# Altium PCB MZCAT_motherboard.PcbDoc (part 2 of 4)
Units mm, origin at the board's own origin, x right, y up, seen from the top; angles counter-clockwise.
Board outline 99.01 x 133.6 mm, 6 copper layers (Top Layer, Ref Top, Layer 2, Layer 3, Ref Bot, Bottom Layer), stack 1.473 mm thick; 289 components, 231 nets, 1176 pads, 492 vias.
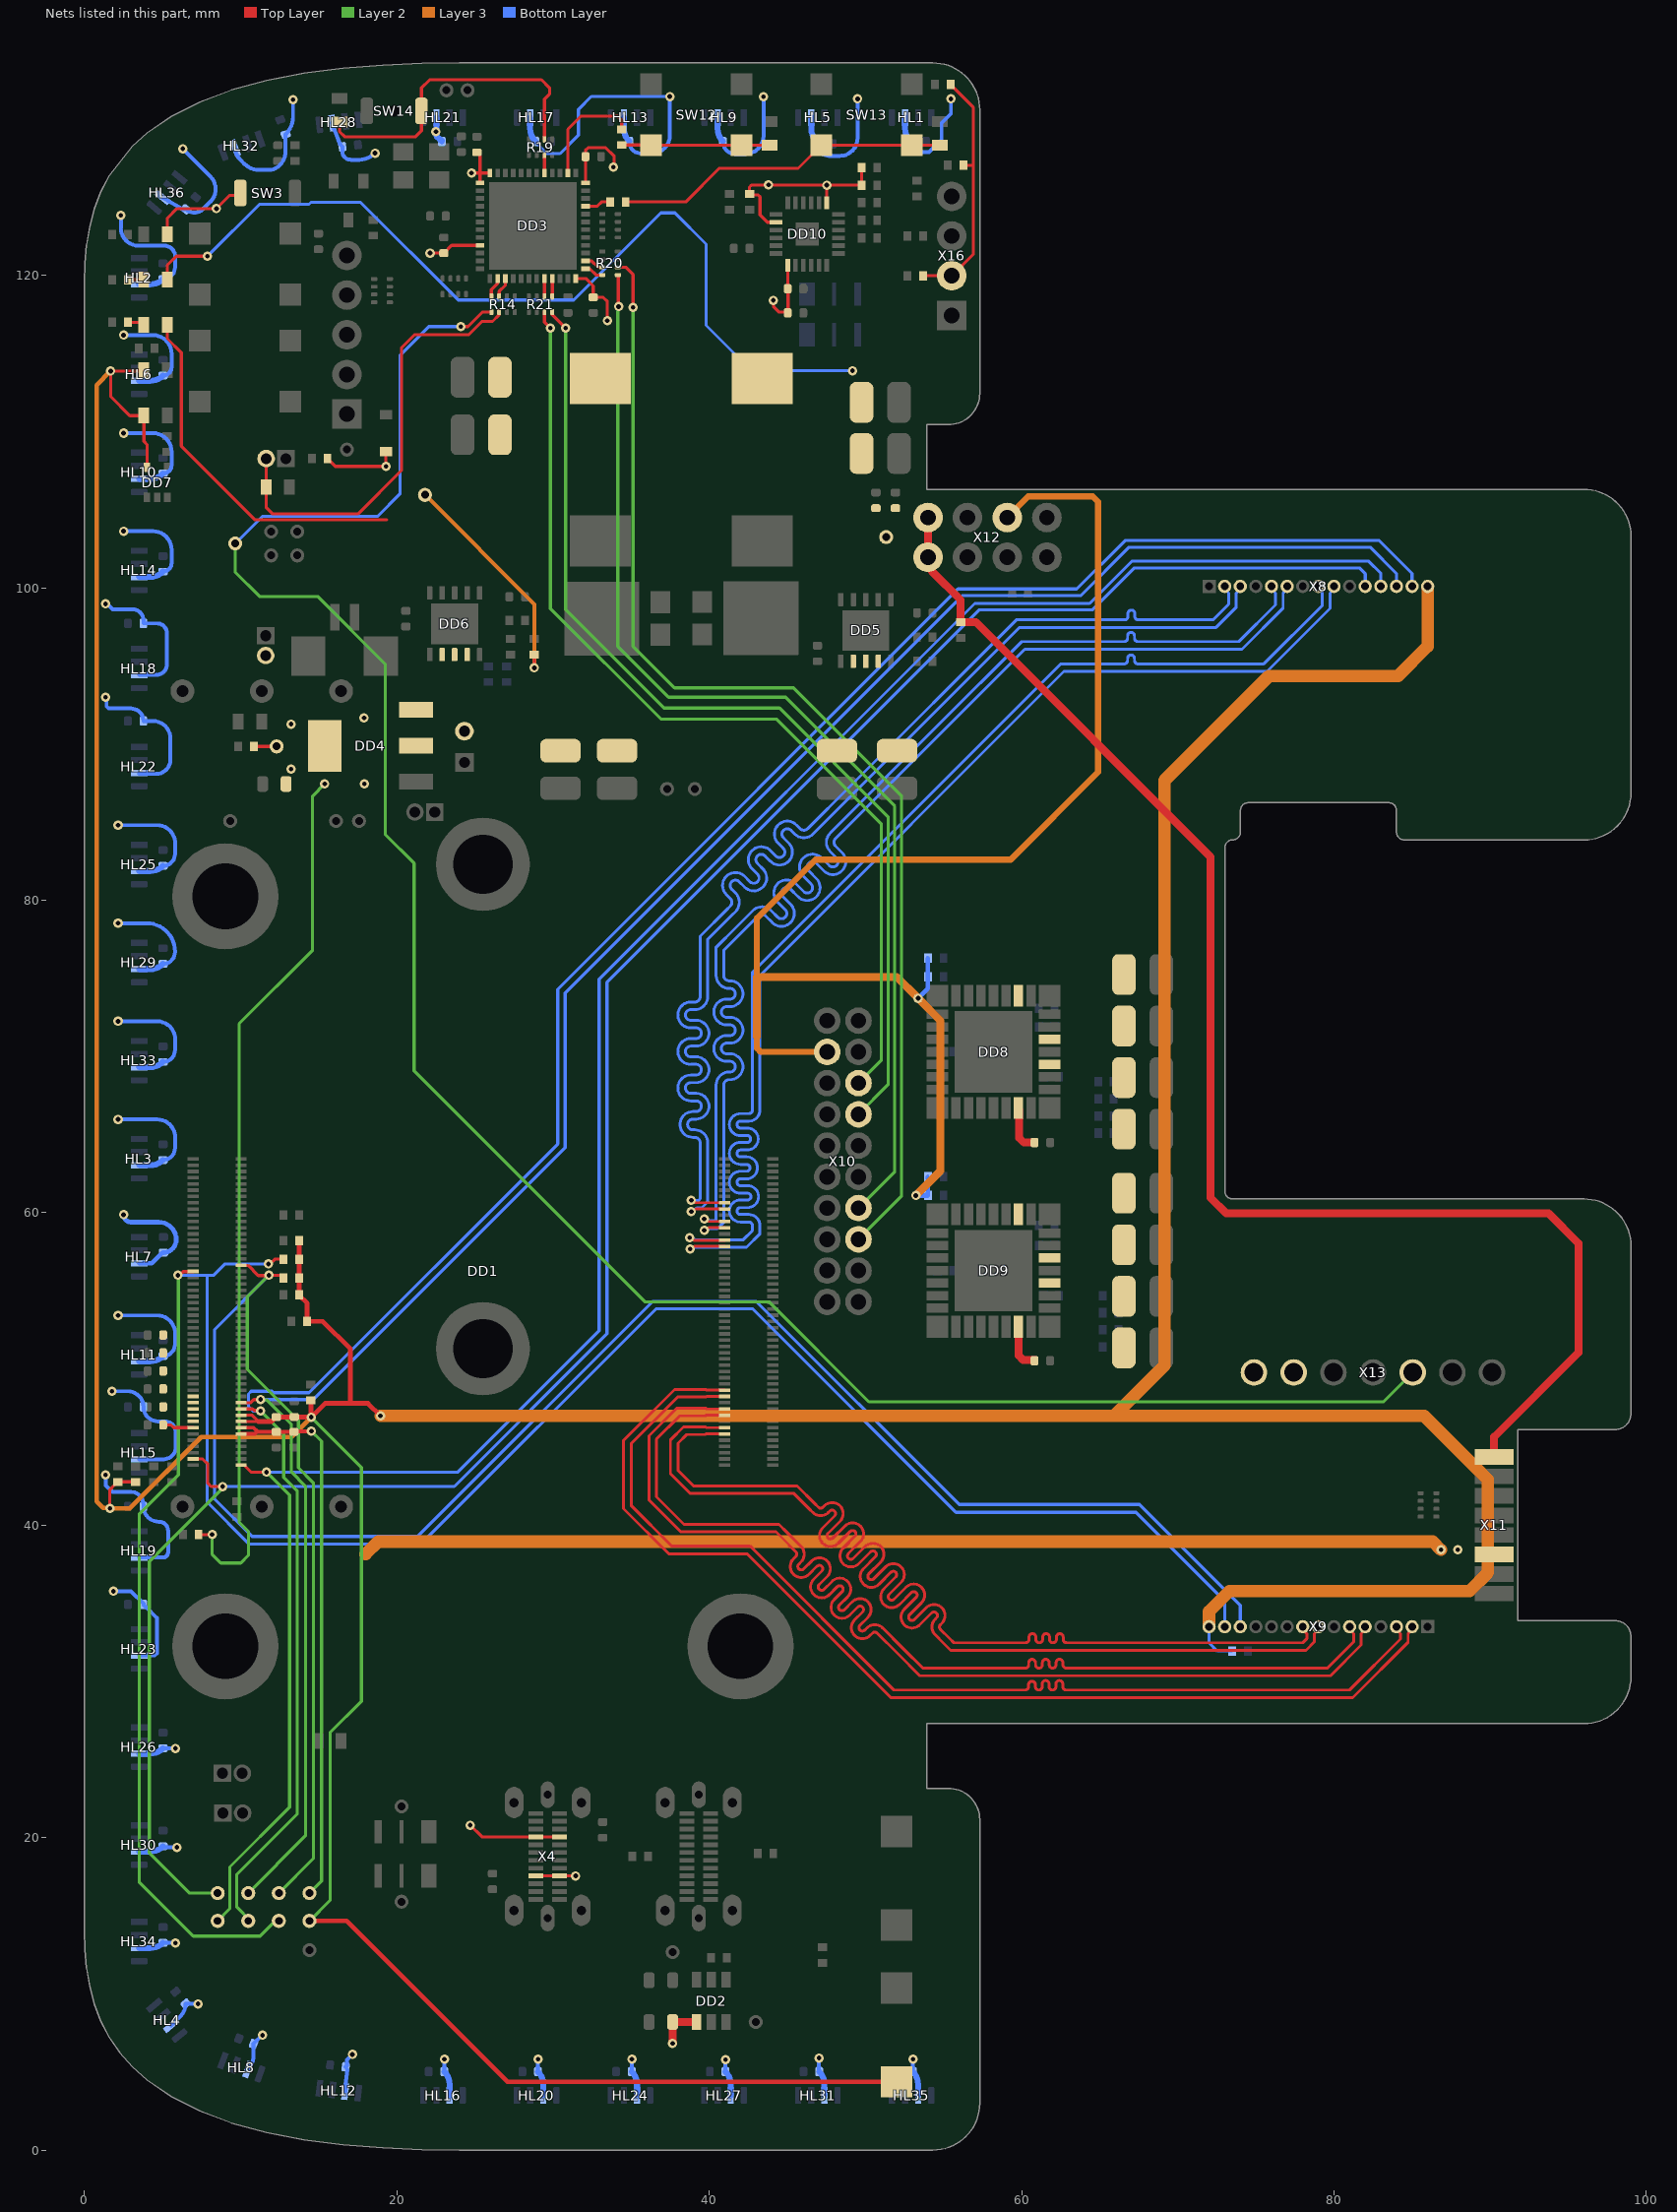
[diagram p6: the nets of this part, all layers, seen from the top]

## Footprints (in the part's own frame and the unit in brackets; to place one, negate y for a bottom-side part, rotate by r counter-clockwise, add the part's x,y. Pads: shape width x height; smd on the part's side, far side on the other; paste and mask are expansions set on the pad) (continued)
SOT23-6 [mm] "SOT95P280X145-6N, SOT23, 6-Leads, Body 2,90x2,80mm, Pitch 0,95mm, IPC Medium Density"
  rect 1x0.6 smd: 1(-1.35,0.95) 2(-1.35,0) 3(-1.35,-0.95) 4(1.35,-0.95) 5(1.35,0) 6(1.35,0.95)
  silkscreen extent -1.47,-1.55 0.45,1.92, body extent -0.85,-1.55 0.85,1.55, height 1.45
SOT353 [mm]
  rect 0.6x0.42 smd: 1(-0.95,0.65) 2(-0.95,0) 3(-0.95,-0.65) 4(0.95,-0.65) 5(0.95,0.65)
  silkscreen extent -1.25,-1.2 0.75,1.4, body extent -1.17,-1.13 1.12,1.12, height 1.1
SOT-223 [mm] "MC33269"
  rect 2.15x1 smd: 1(-2.925,2.3) 2(-2.925,0) 3(-2.925,-2.3)
  rect 2.15x3.3 smd: 2(2.925,0)
  silkscreen extent -1.55,-3.35 1.55,3.35, body extent -3.48,-3.25 3.48,3.25, height 1.65
SRP1038A [mm] "SRP1038A-4R7M"
  rect 3.3x3.9 smd: 1(-5.2,0) 2(5.2,0)
  silkscreen extent -5.25,-4.85 5.25,4.85, body extent -5.5,-5.15 5.5,5.15, height 4
TO-277A [mm] "SMPC (TO-277A)"
  rrect1% 1.27x1.4 smd: 1(-2.76,1.04) 2(-2.76,-1.04)
  rrect1% 4.8x4.72 smd: 3(1,0)
  silkscreen extent -3.25,-2.3 3.73,2.7, body extent -3.25,-2.3 3.25,2.3, height 1.2
UFQFPN48 [mm] "PQFN, 48-Leads, Body 7,00x7,00mm, Pitch 0,50mm, Thermal Pad 5,60x5,60mm, IPC Medium Density"
  rrect50% 0.55x0.3 smd: 1(-3.375,2.75)
  rect 0.55x0.3 smd: 2(-3.375,2.25) 3(-3.375,1.75) 4(-3.375,1.25) 5(-3.375,0.75) 6(-3.375,0.25) 7(-3.375,-0.25) 8(-3.375,-0.75) 9(-3.375,-1.25) 10(-3.375,-1.75) 11(-3.375,-2.25) 12(-3.375,-2.75) 25(3.375,-2.75) 26(3.375,-2.25) 27(3.375,-1.75) 28(3.375,-1.25) 29(3.375,-0.75) 30(3.375,-0.25) 31(3.375,0.25) 32(3.375,0.75) 33(3.375,1.25) 34(3.375,1.75) 35(3.375,2.25) 36(3.375,2.75)
  rect 0.3x0.55 smd: 13(-2.75,-3.375) 14(-2.25,-3.375) 15(-1.75,-3.375) 16(-1.25,-3.375) 17(-0.75,-3.375) 18(-0.25,-3.375) 19(0.25,-3.375) 20(0.75,-3.375) 21(1.25,-3.375) 22(1.75,-3.375) 23(2.25,-3.375) 24(2.75,-3.375) 37(2.75,3.375) 38(2.25,3.375) 39(1.75,3.375) 40(1.25,3.375) 41(0.75,3.375) 42(0.25,3.375) 43(-0.25,3.375) 44(-0.75,3.375) 45(-1.25,3.375) 46(-1.75,3.375) 47(-2.25,3.375) 48(-2.75,3.375)
  rect 5.6x5.6 smd: 49(0,0)
  silkscreen extent -4.32,-3.55 3.55,3.55, body extent -3.55,-3.55 3.55,3.55, height 0.6
"ws2812b 4020" [mm] "ws2812b led in 4020 case"
  rrect50% 1.09x0.4 smd: 1(0,1.26)
  rect 1.09x0.4 smd: 2(0,0.42) 3(0,-0.42) 4(0,-1.26)
  silkscreen extent -1.5,-2.2 0.45,2.2, body extent -1.3,-2 0.45,2, height 2
WSON-10 [mm]
  rect 2.6x3 smd: 0(0,0)
  rect 0.85x0.35 smd paste-0.02 mask+0.08: 1(-1.975,1.6)
  rrect25% 0.85x0.35 smd paste-0.02 mask+0.08: 2(-1.975,0.8) 3(-1.975,0) 4(-1.975,-0.8) 5(-1.975,-1.6) 6(1.975,-1.6) 7(1.975,-0.8) 8(1.975,0) 9(1.975,0.8) 10(1.975,1.6)
  silkscreen extent -2.52,-2.15 1.3,2.32, body extent -2,-2 2,2, height 0.8

## Part data
DD1: "Raspberry Pi Compute Module 5", Name="Raspberry Pi CM5"
DD2: "PRECISION ADJUSTABLE CURRENT-LIMITED POWER SWITCHES", Name=AP22653W6
DD3: "микроконтроллер STM32F412, 48-UFQFPN, 100 MHz, 1024kB FLASH, 320kB RAM", Name=STM32F412CGU6
DD4: "LM1117GS-3.3", Contact_1=IN+, Contact_2=GND, Contact_3=OUT+, Name=LM1117-3.3
DD5 DD6: "Стабилизатор напряжения 5А", Name=LMR14050QDPRRQ1
DD7: "буферный элемент с открытым стоком", Name=74LVC1G07GW
DD8 DD9: "Драйвер мотора", Name=MС33926
HL1 HL2 HL3 HL4 HL5 HL6 HL7 HL8 HL9 HL10 HL11 HL12 HL13 HL14 HL15 HL16 HL17 HL18 HL19 HL20 HL21 HL22 HL23 HL24 HL25 HL26 HL27 HL28 HL29 HL30 HL31 HL32 HL33 HL34 HL35 HL36: "адресный светодиод на микросхеме WS2812b", Name=WS2812B
L1 L2: library part Индуктивность
R1 R2 R3 R4 R5 R6 R7 R8 R9 R10 R11 R16 R17 R18 R22 R23 R24 R25 R26 R27 R28 R29 R30 R31 R32 R33 R34 R35 R36 R37 R38 R39 R40 R42 R43 R44 R45 R46 R47 R48 R49 R50 R51 R52 R53 R54 R55 R56 R57 R58 R59 R60 R61 R62 R63 R64 R65 R66 R67 R68 R69 R70 R71 R72 R73 R74 R75 R76 R77 R78: library part "Резистор 0.05Вт", "Резистор 0,05Вт"
R12 R13 R14 R15 R19 R20 R21 R41: library part "Резисторная сборка 0.05 x 4"
SW1 SW2 SW3 SW6 SW9 SW12 SW13 SW14: library part button
SW4 SW5 SW7 SW8 SW15: library part Jumper, "Перемычка"
SW10 SW11: library part "Концевой выключатель"
VD1: library part "Diode Shottky", "Диод Шоттки"
VD2 VD3 VD4 VD7 VD8 VD9 VD10 VD11 VD12 VD13 VD14: library part "SMD светодиод", "Светодтод SMD"
  VD2 VD3 VD4 VD8 VD9 VD10 VD11 VD12 VD13 VD14: Name="Красный светодиод"
  VD7: Name="Синий светодиод"
VD5 VD6: library part SS10PH10, "Диод Шоттки"
VT1: "мосфет n-канал IRLML2502TRPBF", Name=IRLML2502TRPBF
X1 X4: "USB Type-C 3.1", Contact_1=GND, Contact_2=TX1P, Contact_3=TX1N, Contact_4=VBUS, Contact_5=CC1, Contact_6=DP, Contact_7=DN, Contact_8=SBU1, Contact_9=VBUS, Contact_10=RX2N, Contact_11=RX2P, Contact_12=GND, Contact_13=GND, Contact_14=RX1P, Contact_15=RX1N, Contact_16=VBUS, Contact_17=SBU2, Contact_18=DN, Contact_19=DP, Contact_20=CC2, Contact_21=VBUS, Contact_22=TX2N, Contact_23=TX2P, Contact_24=GND, Name=2047110001
X2 X3 X14 X15: library part "Jumper x3", "Перемычка паяльная на плате", Id=28, Name=SW_Jumper_3_pins, Доп_Тип=Перемычки, Основной тип="Места под пайку", Тип корпуса=0805
X6 X7: library part Header_2, "Разъем - 2 конт. розетка", Contact_1=VCC, Contact_2=GND, Contact_3=TP, Name=MW-2M
X8 X9: library part Header_15, "Разъем - 15 конт. папа", Contact_1=GND, Contact_2=RX_D0N, Contact_3=RX_D0P, Contact_4=GND, Contact_5=RX_D1N, Contact_6=RX_D1P, Contact_7=GND, Contact_8=RX_CLKON, Contact_9=RX_CLKOP, Contact_10=GND, Contact_11=CAM_IO0, Contact_12=CAM_IO1, Contact_13=SCL, Contact_14=SDA, Contact_15=+3,3В, Name="PLS 1.0 1x15"
X10: library part "PLS 10 x 2", Contact_1=M1A, Contact_2=M1A, Contact_3=GND, Contact_4=+5В, Contact_5=ENC1A, Contact_6=SDA, Contact_7=ENC1B, Contact_8=SCL, Contact_9=M1B, Contact_10=M1B, Contact_11=M2A, Contact_12=M2A, Contact_13=ENC2A, Contact_14=REFL, Contact_15=ENC2B, Contact_16=CAM_DP, Contact_17=GND, Contact_18=CAM_DN, Contact_19=M2B, Contact_20=M2B, Name=PLD2-2x10
X11 X12: library part Header_8, "Разъем - 8 конт. мама"
  X11: Contact_1=GND, Contact_2=GND, Contact_3=+5В, Contact_4=DN, Contact_5=DP, Contact_6=LED_DATA, Contact_7=SERVO_DATA, Contact_8=+7,2В, Name=PicoBlade-8
  X12: Contact_1=+7,2В, Contact_2=+7,2В, Contact_3=SERVO_X, Contact_4=SERVO_Y, Contact_5=+5В, Contact_6=LiDAR_TX, Contact_7=GND, Contact_8=GND
X13: library part Header_7_fth, "Разъем - 7 конт. папа", Contact_1=PACK+, Contact_2=PACK+, Contact_3=BTN1, Contact_4=BTN2, Contact_5=CHG_OUT, Contact_6=GND, Contact_7=GND, Contact_8=TP, Name=640456-7
X16: library part "PLS 1 x 4", Contact_1=SDA, Contact_2=SCL, Contact_3=+3,3В, Contact_4=GND, Name=DS1021-1x4
XT1: library part 12.88605, "Резонатор / Geyer", Name=12.88605
С1 С2 С3 С4 С5 С6 С7 С8 С9 С10 С11 С12 С13 С14 С15 С17 С18 С19 С20 С21 С22 С23 С24 С25 С26 С27 С28 С29 С30 С31 С32 С33 С34 С35 С36 С37 С38 С39 С40 С41 С42 С43 С44 С45 С46 С47 С48 С49 С50 С51 С52 С53 С54 С55 С56 С57 С58 С59 С60 С61 С62 С63 С64 С65 С66 С67 С68 С69 С70 С71 С72 С73 С74 С75 С76 С77 С78 С79 С80 С81 С82 С83 С84 С85 С86 С87 С88: library part "Кер. конденсатор"
DD10: Name=MPU9250
X5: Contact_1=+3,3В, Contact_2=SWCLK, Contact_3=GND, Contact_4=SWDIO, Contact_5=NRST, Name="PLS 1 x 5"

## Free pads (board coordinates)
  round 6 hole 3.8: 4(25.509,82.302) 6(25.509,51.302)

## Via types
v1: diameter 0.6, hole 0.3, Top Layer to Bottom Layer, tented both sides, 477 vias
v2: diameter 0.6, hole 0.3, Top Layer to Bottom Layer, 15 vias

## Nets (pads, with @x,y where several pads share a name; then routed paths per layer and width w, separated by ;. In a path a pad name is that pad's centre, name@x,y a point inside that pad or via, vN(x,y) a via of type N, cw(c..) or ccw(c..) an arc to the next point about the centre after c; other vN are vias at no path point)
5V_PWR_LED_5: R26.1 VD4.1 | length 1.1
  Top Layer w0.2: R26.1@2.775,117 3.625,117 VD4.1@3.8,116.825
7,2V_PWR_LED_5: R25.1 VD3.1 | length 1
  Top Layer w0.2: R25.1@2.775,119.725 VD3.1@3.8,119.725
+3,3В: DD3.1 DD3.9 DD3.24 DD3.36 DD3.48 DD4.2 DD10.1 DD10.8 DD10.13 R64.2 R69.2 R70.2 R73.2 R74.2 R75.2 R76.2 R77.2 R78.2 SW3.1 TP17.1 VD1.2 VD2.1 X16.3 С10.2 С11.2 С12.2 С13.2 С19.2 С59.2 С60.2 | length 118.5
  Top Layer w0.2: VD2.1@5.3,122.625 5.3,123.65 5.925,124.275 v1(8.45,124.275) 9.301,125.126 9.826,125.126 SW3.1@9.975,125.275 ; R78.2@7.3,39.4 v1(8.175,39.4) ; R77.2@10.85,89.85 TP17.1@12.175,89.85 ; R76.2@15.555,108.275 16.055,107.775 v1(19.3,107.775) VD1.2@19.3,108.725 ; v1(22.125,121.425) С11.2@23.005,121.425 23.505,121.925 DD3.9@25.325,121.925 ; v1(24.775,126.55) 25.325,126.55 ; С10.2@25.125,127.875 25.325,127.675 25.325,126.55 ; DD3.1@25.325,125.925 25.325,126.55 ; DD3.48@25.95,126.55 25.325,126.55 ; DD3.24@31.45,119.8 32.1,119.8 32.575,119.325 С12.2@32.575,118.6 33.2,118.6 33.475,118.325 v1(33.475,117.1) ; DD3.36@32.075,125.925 С13.2@32.075,127.6 32.075,127.999 32.251,128.175 33.366,128.175 33.915,127.625 33.915,126.974 v1(33.866,126.925) ; v1(44.1,118.4) 44.124,118.376 44.124,117.976 44.442,117.658 45.044,117.658 45.044,119.126 С59.2@45.025,119.145 ; DD10.8@44.275,123.4 43.725,123.4 43.25,123.875 43.25,125.033 43.133,125.15 42.575,125.15 R64.2@42.575,125.2 42.575,125.658 42.692,125.775 v1(47.525,125.775) ; С59.2@45.025,119.345 DD10.13@45.025,120.65 ; DD10.1@47.525,124.65 v1(47.525,125.775) ; R70.2@49.75,126.9 R69.2@49.75,125.775 v1(47.525,125.775) ; R73.2@53.7,119.98 X16.3@55.525,119.98 ; R75.2@55.45,132.225 55.45,132.175 55.6,132.025 55.625,132.025 56.916,130.734 56.916,127.05 R74.2@56.275,127.05 ; X16.3@55.526,119.98 56.916,121.37 56.916,127.03
  Layer 2 w0.2: v1(8.175,39.4) 8.175,38.125 8.725,37.575 10,37.575 10.5,38.075 10.5,39.588 9.9,40.188 9.9,72.1 14.6,76.8 14.6,86.675 v1(15.375,87.45)
  other v1: 17.925,87.45 13.225,88.4 13.225,91.275 17.9,91.675 43.8,125.8
+3S: DD4.3 DD5.2 DD5.3 DD5.4 DD6.2 DD6.3 DD6.4 DD8.4 DD8.6 DD8.11 DD8.31 DD9.4 DD9.6 DD9.11 DD9.31 X7.1 X13.1 X13.2 С14.2 С15.2 С17.2 С18.2 С40.2 С41.2 С42.2 С43.2 С44.1 С45.1 С46.2 С47.2 С48.2 С49.2 | length 6.1
  Top Layer w0.2: DD8.31@59.75,66.648 DD8.31@59.8,66.698
  Top Layer w0.5: DD8.31@59.75,66.648 59.85,66.548 59.85,64.785 60.143,64.492 С44.1@60.827,64.492 ; DD9.31@59.8,52.698 59.8,50.871 60.093,50.578 С45.1@60.827,50.578
+5В: DD1.77 DD1.79 DD1.81 DD1.83 DD1.85 DD1.87 DD2.1 HL1.2 HL2.2 HL3.2 HL4.2 HL5.2 HL6.2 HL7.2 HL8.2 HL9.2 HL10.2 HL11.2 HL12.2 HL13.2 HL14.2 HL15.2 HL16.2 HL17.2 HL18.2 HL19.2 HL20.2 HL21.2 HL22.2 HL23.2 HL24.2 HL25.2 HL26.2 HL27.2 HL28.2 HL29.2 HL30.2 HL31.2 HL32.2 HL33.2 HL34.2 HL35.2 HL36.2 L2.1 R29.2 R50.1 R53.1 R54.1 R56.1 SW4.2 TP18.1 VD4.2 X4.4 X4.9 X4.16 X4.21 X10.4 X11.3 X12.5 С1.2 С25.2 С27.2 С30.2 С32.2 С34.2 С37.2 С38.2 С39.2 С51.2 С52.2 С53.2 С54.2 С55.2 С56.2 С57.2 С58.2 С61.2 С62.2 С63.2 С64.2 С65.2 С66.2 С67.2 С68.2 С69.2 С70.2 С71.2 С72.2 С73.2 С74.2 С75.2 С76.2 С77.2 С78.2 С79.2 С80.2 С81.2 С82.2 С83.2 С84.2 С85.2 С86.2 С87.2 С88.2 | length 429.4
  Top Layer w0.2: С37.2@5.038,46.42 5.041,46.417 5.548,46.417 5.723,46.243 DD1.87@6.95,46.243 ; VD4.2@5.3,116.825 5.3,115.95 6.2,115.05 6.2,109.075 10.925,104.35 19.358,104.35 ; v1(24.7,20.8) 25.45,20.05 29.024,20.05 X4.4@30.41,20.05 ; v1(28.8,94.875) R29.2@28.8,95.7 ; X4.21@28.9,17.55 30.268,17.55 v1(31.45,17.55)
  Top Layer w0.5: v1(37.65,6.825) С1.2@37.65,8.2 DD2.1@39.175,8.2
  Layer 3 w0.25: TP18.1@21.8,105.95 28.8,98.95 v1(28.8,94.875)
  Layer 3 w0.4: 43.05,71.258 43.05,70.532 43.284,70.298 X10.4@47.553,70.298 ; 43.05,75.1 43.05,78.85 46.8,82.6 59.3,82.6 64.9,88.2 64.9,105.5 64.55,105.85 60.43,105.85 X12.5@59.08,104.5
  Layer 3 w0.5: 43.05,71.258 43.05,75.1 52,75.1 v1(53.375,73.725) 54.8,72.3 54.8,62.675 v1(53.225,61.1)
  Layer 3 w0.8: 18.001,38.151 18.8,38.95 86.325,38.95 v1(86.85,38.425)
  Bottom Layer w0.2: С69.2@28.875,128.575 28.875,128.525 29.6,127.8 30.45,127.8 31.625,128.975 31.625,130.625 32.45,131.45 v1(37.475,131.45)
  Bottom Layer w0.25: v1(1.35,43.225) 1.369,43.206 1.369,42.55 1.794,42.125 2.975,42.125 cw(c2.975,41.325) 3.775,41.325 С57.2@3.775,41.2 3.791,41.025 ccw(c4.756,41.2) 4.071,40.498 ccw(c4.758,41.202) 4.77,40.218 4.786,40.218 cw(c4.782,39.65) 5.35,39.65 5.35,38.25 cw(c5.034,38.25) 5.034,37.934 HL19.2@3.5,37.934 ; v1(1.35,93) 1.41,92.94 1.41,92.421 1.556,92.275 2.975,92.275 cw(c2.975,91.475) С74.2@3.775,91.475 4.375,91.475 cw(c4.375,90.35) 5.5,90.35 5.5,89 cw(c4.6,89) 4.6,88.1 3.542,88.1 cw(c3.542,88.142) HL22.2@3.5,88.142 ; v1(1.35,98.975) 1.445,98.975 1.795,98.625 3.075,98.625 cw(c3.075,97.925) 3.775,97.925 С70.2@3.775,97.725 4.65,97.725 cw(c4.65,97.1) 5.275,97.1 5.275,95.1 cw(c4.6,95.1) 4.6,94.425 3.5,94.425 HL18.2@3.5,94.418 ; v1(1.75,48.575) 2.77,48.575 cw(c2.77,47.57) С63.2@3.775,47.57 ccw(c4.695,47.57) 4.695,46.65 5.125,46.65 cw(c5.125,45.925) 5.85,45.925 5.85,45.005 cw(c5.07,45.005) 5.07,44.225 3.5,44.225 HL15.2@3.5,44.21 ; v1(1.85,35.775) 2.975,35.775 3.775,34.975 С53.2@3.775,34.925 3.775,34.875 3.9,34.75 3.95,34.75 4.625,34.075 4.625,31.804 4.479,31.658 HL23.2@3.5,31.658 ; v1(2.15,53.426) 4.65,53.426 cw(c4.65,52.276) 5.734,52.659 cw(c4.65,52.276) 5.8,52.276 5.8,51.601 cw(c5.025,51.601) С67.2@5.025,50.826 ; v1(2.15,65.978) 4.65,65.978 cw(c4.65,64.828) 5.734,65.211 cw(c4.65,64.828) 5.8,64.828 5.8,64.153 cw(c5.025,64.153) С75.2@5.025,63.378 ; v1(2.15,72.254) 4.65,72.254 cw(c4.65,71.104) 5.734,71.487 cw(c4.65,71.104) 5.8,71.104 5.8,70.429 cw(c5.025,70.429) С85.2@5.025,69.654 ; v1(2.15,78.53) 3.975,78.53 cw(c3.975,76.705) 5.8,76.705 cw(c5.025,76.705) С81.2@5.025,75.93 ; v1(2.15,84.806) 4.65,84.806 cw(c4.65,83.656) 5.734,84.039 cw(c4.65,83.656) 5.8,83.656 5.8,82.981 cw(c5.025,82.981) С77.2@5.025,82.206 ; v1(2.325,123.85) 2.325,123.035 ccw(c3.46,123.035) 3.46,121.9 5.112,121.9 cw(c5.112,121.212) 5.28,121.879 cw(c5.112,121.212) 5.593,121.704 cw(c5.112,121.212) 5.8,121.212 5.8,120.537 cw(c5.025,120.537) С52.2@5.025,119.762 ; v1(2.5,103.626) 4.375,103.626 cw(c4.375,102.426) 5.575,102.426 5.575,101.584 cw(c5.025,101.584) С66.2@5.025,101.034 ; v1(2.5,109.902) 4.375,109.902 cw(c4.375,108.702) 5.575,108.702 5.575,107.86 cw(c5.025,107.86) С62.2@5.025,107.31 ; v1(2.5,116.178) 4.375,116.178 cw(c4.375,114.978) 5.575,114.978 5.575,114.136 cw(c5.025,114.136) С56.2@5.025,113.586 ; HL36.2@5.005,124.978 5.375,124.766 6.268,124.251 С88.2@6.482,124.234 ccw(c7.03,124.782) 7.578,124.234 8.056,124.711 ccw(c7.242,125.524) 8.28,125.029 ccw(c7.242,125.524) 8.056,126.338 v1(6.288,128.105) ; С86.2@5.029,13.266 v1@5.814,13.266 ; С78.2@5.029,25.718 v1@5.814,25.718 ; С82.2@5.129,19.387 v1@5.914,19.387 ; HL4.2@5.545,7.978 6.145,8.578 ccw(c5.348,9.375) С54.2@6.475,9.375 ; С54.2@6.479,9.371 v1@7.264,9.371 ; HL32.2@9.655,128.156 ccw(c10.71,128.156) 9.964,127.411 10.225,127.15 ccw(c11.191,128.116) 11.191,126.75 11.776,126.75 ccw(c11.776,127.774) 12.5,127.05 ccw(c11.595,127.955) 12.875,127.955 С84.2@12.875,129.025 ccw(c11.728,130.172) 13.35,130.172 v1(13.35,131.25) ; HL8.2@10.445,5.156 ccw(c9.535,6.066) 10.822,6.066 С58.2@10.822,6.802 11.365,7.346 cw(c11.393,7.318) v1(11.393,7.357) ; HL28.2@15.866,129.748 15.992,129.34 16.364,128.392 С80.2@16.51,128.233 16.51,127.913 ccw(c16.988,127.913) 16.65,127.575 ccw(c17.072,127.997) 17.072,127.4 17.574,127.4 ccw(c17.574,128.851) v1(18.6,127.825) ; HL12.2@16.7,3.75 16.705,4.173 16.823,5.134 С64.2@16.72,5.323 ; С64.2@16.789,5.387 16.789,5.764 v1(17.15,6.125) ; С68.2@23.039,5.029 v1@23.039,5.814 ; С72.2@29.039,5.029 v1@29.039,5.814 ; С65.2@34.875,128.575 ccw(c35.65,128.575) 35.65,127.8 36.325,127.8 ccw(c36.325,128.95) 37.475,128.95 v1(37.475,131.45) ; С76.2@35.039,5.029 v1@35.039,5.814 ; С61.2@40.875,128.555 ccw(c41.65,128.555) 41.65,127.78 42.325,127.78 ccw(c42.325,128.93) 42.708,127.846 ccw(c42.325,128.93) 43.475,128.93 v1(43.475,131.43) ; С79.2@41.039,5.029 41.037,5.031 41.037,5.786 v1(41.039,5.788) ; С55.2@46.9,128.425 ccw(c47.675,128.425) 47.675,127.65 48.35,127.65 ccw(c48.35,128.8) 48.733,127.716 ccw(c48.35,128.8) 49.5,128.8 v1(49.5,131.3) ; С83.2@47.029,5.104 v1@47.029,5.889 ; С51.2@52.875,128.575 ccw(c53.65,128.575) 53.269,127.9 ; С87.2@53.035,5.025 53.042,5.032 53.042,5.817 v1(53.05,5.825) ; 53.2,127.9 53.269,127.9 ; v1@55.475,131.35 v1(55.475,131.3) 55.475,130.35 54.875,129.75 54.875,128.688 54.087,127.9 53.269,127.9
  Bottom Layer w0.3: v1(2.5,59.875) ccw(c2.975,59.875) 2.975,59.4 4.75,59.4 cw(c4.75,58.275) 5.875,58.275 cw(c5.05,58.275) 5.2,57.464 С71.2@5.05,57.45 5,57.45 4.312,56.762 HL7.2@3.5,56.762 ; v1(53.225,61.1) R56.1@54,61.1 R53.1@54,62.3 ; v1(53.375,73.725) 54,74.35 R54.1@54,75.1 R50.1@54,76.3
  Bottom Layer w0.381: HL34.2@3.5,12.93 4.204,12.93 ccw(c4.204,14.091) С86.2@5.025,13.27 ; HL30.2@3.5,19.106 4.204,19.106 ccw(c4.204,20.267) С82.2@5.025,19.446 ; HL26.2@3.5,25.382 4.204,25.382 ccw(c4.204,26.543) С78.2@5.025,25.722 ; HL11.2@3.5,50.486 4.204,50.486 ccw(c4.204,51.647) С67.2@5.025,50.826 ; HL3.2@3.5,63.038 4.204,63.038 ccw(c4.204,64.199) С75.2@5.025,63.378 ; HL33.2@3.5,69.314 4.204,69.314 ccw(c4.204,70.475) С85.2@5.025,69.654 ; HL29.2@3.5,75.59 4.204,75.59 ccw(c4.204,76.751) С81.2@5.025,75.93 ; HL25.2@3.5,81.866 4.204,81.866 ccw(c4.204,83.027) С77.2@5.025,82.206 ; HL14.2@3.5,100.694 4.204,100.694 ccw(c4.204,101.855) С66.2@5.025,101.034 ; HL10.2@3.5,106.97 4.204,106.97 ccw(c4.204,108.131) С62.2@5.025,107.31 ; HL6.2@3.5,113.246 4.204,113.246 ccw(c4.204,114.407) С56.2@5.025,113.586 ; HL2.2@3.5,119.422 4.204,119.422 ccw(c4.204,120.583) С52.2@5.025,119.762 ; v1(22.5,129.2) v1@22.526,129.226 ; HL21.2@22.526,130.091 v1@22.526,129.226 ; С73.2@22.875,128.575 22.875,128.625 22.816,128.685 22.766,128.685 22.526,128.925 v1@22.526,129.226 ; С68.2@23.035,5.025 cw(c22.214,4.204) 23.375,4.204 HL16.2@23.375,3.5 ; HL17.2@28.535,130.1 28.535,129.396 ccw(c29.696,129.396) С69.2@28.875,128.575 ; С72.2@29.035,5.025 cw(c28.214,4.204) 29.375,4.204 HL20.2@29.375,3.5 ; HL13.2@34.535,130.1 34.535,129.396 ccw(c35.696,129.396) С65.2@34.875,128.575 ; С76.2@35.035,5.025 cw(c34.214,4.204) 35.375,4.204 HL24.2@35.375,3.5 ; HL9.2@40.535,130.1 40.535,129.396 ccw(c41.696,129.396) С61.2@40.875,128.575 ; С79.2@41.035,5.025 cw(c40.214,4.204) 41.375,4.204 HL27.2@41.375,3.5 ; HL5.2@46.535,130.1 46.535,129.396 ccw(c47.696,129.396) С55.2@46.875,128.575 ; С83.2@47.035,5.025 cw(c46.214,4.204) 47.375,4.204 HL31.2@47.375,3.5 ; HL1.2@52.535,130.1 52.535,129.396 ccw(c53.696,129.396) С51.2@52.875,128.575 ; С87.2@53.035,5.025 cw(c52.214,4.204) 53.375,4.204 HL35.2@53.375,3.5
  other v1: 23.046,5.821 29.046,5.821 35.046,5.821 47.036,5.896 7.271,9.364 5.821,13.259 5.922,19.379 5.821,25.711 87.925,38.425
+7,2В: L1.1 R27.2 TP19.1 VD3.2 X11.8 X12.1 X12.2 С24.2 С26.2 С28.2 С29.2 | length 150.8
  Top Layer w0.2: VD3.2@5.3,119.725 5.3,120.65 5.875,121.225 v1(7.875,121.225)
  Top Layer w0.5: X12.1@54,104.5 X12.2@54,101.96 54.268,101.692 54.268,101.055 56.1,99.223 R27.2@56.1,97.797 ; R27.2@56.15,97.797 57.078,97.797 72.1,82.775 72.1,60.958 73.1,59.958 93.742,59.958 95.65,58.05 95.65,51.05 90.25,45.65 X11.8@90.25,44.375
  Bottom Layer w0.2: v1(7.875,121.225) 11.2,124.55 14.375,124.55 14.5,124.675 17.675,124.675 23.925,118.425 31.325,118.425 36.9,124 37.8,124 39.8,122 39.8,116.8 42.7,113.9 v1(49.175,113.9)
CAMERA_0.RX_CLK0_N: DD1.127 X8.8 | length 79.3
  Top Layer w0.184: v1(38.75,58.4) 38.863,58.4 39.02,58.243 DD1.127@40.988,58.243
  Bottom Layer w0.184: v1(38.75,58.4) 38.83,58.32 39.025,58.32 39.066,58.28 40.8,58.28 40.804,58.275 42.183,58.275 42.76,58.852 42.76,59.187 ccw(c42.541,59.187) 42.541,59.406 41.994,59.406 cw(c41.994,60.109) 41.29,60.109 cw(c41.994,60.109) 41.994,60.812 42.455,60.812 ccw(c42.455,61.031) 42.674,61.031 ccw(c42.455,61.031) 42.455,61.25 41.994,61.25 cw(c41.994,61.954) 41.29,61.954 cw(c41.994,61.954) 41.994,62.657 42.386,62.657 ccw(c42.386,62.876) 42.605,62.876 ccw(c42.386,62.876) 42.386,63.095 41.994,63.095 cw(c41.994,63.798) 41.29,63.798 cw(c41.994,63.798) 41.994,64.501 42.431,64.501 ccw(c42.431,64.721) 42.65,64.721 ccw(c42.431,64.721) 42.431,64.94 41.994,64.94 cw(c41.994,65.643) 41.29,65.643 cw(c41.994,65.643) 41.994,66.346 42.541,66.346 ccw(c42.541,66.565) 42.76,66.565 42.76,69.456 42.76,75.385 62.509,95.134 66.475,95.134 66.567,95.134 ccw(c66.567,95.353) 66.786,95.353 66.786,95.484 cw(c67.005,95.484) 67.224,95.484 67.224,95.353 ccw(c67.443,95.353) 67.443,95.134 74.45,95.134 75.509,95.134 79.258,98.883 79.258,99.658 79,99.916 X8.8@79,100.096
CAMERA_0.RX_CLK0_P: DD1.129 X8.9 | length 79.3
  Top Layer w0.184: v1(38.773,57.675) 38.885,57.675 39.053,57.843 DD1.129@40.988,57.843
  Bottom Layer w0.184: v1(38.773,57.675) 38.852,57.755 39.047,57.755 39.088,57.795 40.599,57.795 40.604,57.791 42.383,57.791 43.244,58.652 43.244,58.852 43.244,59.187 ccw(c42.541,59.187) 42.541,59.89 41.994,59.89 cw(c41.994,60.109) 41.775,60.109 cw(c41.994,60.109) 41.994,60.328 42.455,60.328 ccw(c42.455,61.031) 43.158,61.031 ccw(c42.455,61.031) 42.455,61.734 41.994,61.734 cw(c41.994,61.954) 41.775,61.954 cw(c41.994,61.954) 41.994,62.173 42.386,62.173 ccw(c42.386,62.876) 43.09,62.876 ccw(c42.386,62.876) 42.386,63.579 41.994,63.579 cw(c41.994,63.798) 41.775,63.798 cw(c41.994,63.798) 41.994,64.017 42.431,64.017 ccw(c42.431,64.721) 43.135,64.721 ccw(c42.431,64.721) 42.431,65.424 41.994,65.424 cw(c41.994,65.643) 41.775,65.643 cw(c41.994,65.643) 41.994,65.862 42.541,65.862 ccw(c42.541,66.565) 43.244,66.565 43.244,69.456 43.244,75.185 62.71,94.65 75.71,94.65 79.742,98.682 79.742,99.658 80,99.916 X8.9@80,100.096
CAMERA_0.RX_D0_N: DD1.115 X8.2 | length 78.6
  Top Layer w0.184: v1(38.85,60.8) 38.963,60.8 39.12,60.643 DD1.115@40.988,60.643
  Bottom Layer w0.184: v1(38.85,60.8) 38.861,60.789 39.308,60.789 39.416,60.897 39.416,62.127 39.416,64.482 ccw(c39.074,64.482) 39.074,64.824 38.954,64.824 cw(c38.954,65.65) 38.954,66.477 39.155,66.477 ccw(c39.155,66.819) 39.155,67.161 38.815,67.161 cw(c38.815,67.987) 38.815,68.813 39.155,68.813 ccw(c39.155,69.155) 39.155,69.497 38.815,69.497 cw(c38.815,70.324) 38.815,71.15 39.155,71.15 ccw(c39.155,71.492) 39.155,71.834 38.815,71.834 cw(c38.815,72.66) 38.815,73.487 39.074,73.487 ccw(c39.074,73.829) 39.416,73.829 39.416,75.331 39.416,77.701 41.108,79.392 41.344,79.629 ccw(c41.102,79.871) 41.343,80.113 ; 41.343,80.113 41.092,80.364 cw(c41.675,80.949) 41.091,81.534 41.092,81.535 cw(c41.675,80.949) 42.179,81.605 42.189,81.605 42.606,81.187 ccw(c42.847,81.43) 43.089,81.188 ccw(c42.847,81.43) 43.089,81.672 42.745,82.016 cw(c43.328,82.602) 42.744,83.186 42.745,83.187 cw(c43.328,82.602) 43.831,83.257 43.841,83.257 44.258,82.84 ccw(c44.5,83.082) 44.741,82.84 ccw(c44.5,83.082) 44.741,83.324 44.411,83.655 cw(c44.995,84.239) 44.411,84.823 44.412,84.825 cw(c44.995,84.239) 45.579,84.823 45.817,84.585 ccw(c46.059,84.827) 46.301,84.585 48.963,87.248 59.665,97.95 66.5,97.95 66.592,97.95 ccw(c66.592,98.169) 66.811,98.169 66.811,98.357 cw(c67.03,98.357) 67.249,98.357 67.249,98.169 ccw(c67.468,98.169) 67.468,97.95 71.5,97.95 72.25,97.95 73.258,98.958 73.258,99.658 73,99.916 X8.2@73,100.096
CAMERA_0.RX_D0_P: DD1.117 X8.3 | length 78.7
  Top Layer w0.184: v1(38.85,60.075) 38.963,60.075 39.13,60.243 DD1.117@40.988,60.243
  Bottom Layer w0.184: v1(38.85,60.075) 38.93,60.155 39.042,60.155 39.192,60.304 39.508,60.304 39.9,60.696 39.9,62.127 39.9,64.482 ccw(c39.074,64.482) 39.074,65.308 38.954,65.308 cw(c38.954,65.65) 38.954,65.992 39.155,65.992 ccw(c39.155,66.819) 39.155,67.645 38.815,67.645 cw(c38.815,67.987) 38.815,68.329 39.155,68.329 ccw(c39.155,69.155) 39.155,69.982 38.815,69.982 cw(c38.815,70.324) 38.815,70.666 39.155,70.666 ccw(c39.155,71.492) 39.155,72.318 38.815,72.318 cw(c38.815,72.66) 38.815,73.003 39.074,73.003 ccw(c39.074,73.829) 39.9,73.829 39.9,75.331 39.9,77.5 41.45,79.05 41.686,79.286 ccw(c41.102,79.871) 41.757,80.374 41.757,80.384 41.686,80.455 41.433,80.708 cw(c41.675,80.949) 41.434,81.191 cw(c41.675,80.949) 41.918,81.191 ; 41.918,81.19 42.262,80.847 ccw(c42.847,81.43) 43.432,80.846 43.433,80.847 ccw(c42.847,81.43) 43.502,81.933 43.502,81.943 43.085,82.36 cw(c43.328,82.602) 43.086,82.844 cw(c43.328,82.602) 43.57,82.843 ; 43.571,82.843 43.914,82.499 ccw(c44.5,83.082) 45.084,82.498 45.085,82.499 ccw(c44.5,83.082) 45.155,83.586 45.155,83.595 45.037,83.713 44.753,83.997 cw(c44.995,84.239) 44.753,84.481 cw(c44.995,84.239) 45.237,84.481 45.475,84.243 ccw(c46.059,84.827) 46.643,84.243 49.305,86.905 59.866,97.466 72.451,97.466 73.742,98.757 73.742,99.658 74,99.916 X8.3@74,100.096
CAMERA_0.RX_D1_N: DD1.121 X8.5 | length 79.5
  Top Layer w0.184: v1(39.675,59.6) 39.788,59.6 39.945,59.443 DD1.121@40.988,59.443
  Bottom Layer w0.184: v1(39.675,59.6) 39.755,59.52 39.95,59.52 39.991,59.48 40.333,59.48 40.441,59.587 40.441,64.814 40.441,68.178 cw(c41.267,68.178) 41.267,69.005 41.329,69.005 ccw(c41.329,69.347) 41.329,69.689 41.117,69.689 cw(c41.117,70.515) 41.117,71.341 41.329,71.341 ccw(c41.329,71.683) 41.329,72.025 41.117,72.025 cw(c41.117,72.852) 41.117,73.678 41.329,73.678 ccw(c41.329,74.02) 41.329,74.362 41.267,74.362 cw(c41.267,75.188) 40.441,75.188 40.441,75.523 40.441,76.994 41.724,78.278 42.787,79.34 cw(c43.371,78.756) 43.874,79.411 43.884,79.411 43.955,79.34 44.379,78.917 ccw(c44.62,79.159) 44.862,78.917 ccw(c44.62,79.159) 44.861,79.402 44.375,79.888 cw(c44.958,80.474) 44.374,81.058 44.375,81.059 cw(c44.958,80.474) 45.461,81.129 45.471,81.129 46.031,80.569 ccw(c46.272,80.812) 46.514,80.57 ccw(c46.272,80.812) 46.514,81.054 46.027,81.541 cw(c46.61,82.126) 46.026,82.71 46.027,82.711 cw(c46.61,82.126) 47.114,82.781 47.124,82.781 47.261,82.643 47.672,82.233 ccw(c47.914,82.475) 48.156,82.233 ccw(c47.914,82.475) 48.156,82.716 47.744,83.129 cw(c48.328,83.713) 47.744,84.297 54.678,91.231 60.006,96.559 66.475,96.559 66.567,96.559 ccw(c66.567,96.778) 66.786,96.778 66.786,96.931 cw(c67.005,96.931) 67.224,96.931 67.224,96.778 ccw(c67.443,96.778) 67.443,96.559 70.775,96.559 73.909,96.559 76.258,98.908 76.258,99.658 76,99.916 X8.5@76,100.096
CAMERA_0.RX_D1_P: DD1.123 X8.6 | length 79.5
  Top Layer w0.184: v1(39.675,58.875) 39.788,58.875 39.955,59.043 DD1.123@40.988,59.043
  Bottom Layer w0.184: v1(39.675,58.875) 39.755,58.955 39.95,58.955 39.991,58.995 40.533,58.995 40.925,59.387 40.925,64.814 40.925,68.178 cw(c41.267,68.178) 41.267,68.52 41.329,68.52 ccw(c41.329,69.347) 41.329,70.173 41.117,70.173 cw(c41.117,70.515) 41.117,70.857 41.329,70.857 ccw(c41.329,71.683) 41.329,72.51 41.117,72.51 cw(c41.117,72.852) 41.117,73.194 41.329,73.194 ccw(c41.329,74.02) 41.329,74.846 41.267,74.846 cw(c41.267,75.188) 40.925,75.188 40.925,75.523 40.925,76.794 42.067,77.936 43.129,78.998 cw(c43.371,78.756) 43.614,78.997 ; 43.614,78.997 44.035,78.576 ccw(c44.62,79.159) 45.204,78.575 45.205,78.576 ccw(c44.62,79.159) 45.275,79.663 45.275,79.673 44.715,80.232 cw(c44.958,80.474) 44.716,80.716 cw(c44.958,80.474) 45.2,80.715 45.687,80.228 ccw(c46.272,80.812) 46.856,80.227 46.858,80.229 ccw(c46.272,80.812) 46.927,81.315 46.927,81.325 46.368,81.885 cw(c46.61,82.126) 46.368,82.368 cw(c46.61,82.126) 46.852,82.367 47.33,81.89 ccw(c47.914,82.475) 48.498,81.89 48.499,81.892 ccw(c47.914,82.475) 48.498,83.059 48.086,83.471 cw(c48.328,83.713) 48.086,83.955 55.02,90.889 60.206,96.075 74.11,96.075 76.742,98.707 76.742,99.658 77,99.916 X8.6@77,100.096
CAMERA_0_GPIO.GPIO0: DD1.97 TP5.1 X8.11 | length 145.8
  Top Layer w0.2: DD1.97@6.95,44.243 7.557,44.243 7.89,43.91 7.89,42.683 8.098,42.475 v1(8.85,42.475)
  Layer 2 w0.2: TP5.1@8.525,16.45 6.725,16.45 4.15,19.025 4.15,37.679 8.85,42.379 v1(8.85,42.475)
  Bottom Layer w0.2: v1(8.85,42.475) 23.675,42.475 33.45,52.25 33.45,74.75 57.3,98.6 64.551,98.6 67.226,101.275 81.625,101.275 82,100.9 X8.11@82,100.096
CAMERA_0_GPIO.GPIO1: DD1.100 TP6.1 X8.12 | length 142.9
  Top Layer w0.2: DD1.100@10.03,43.843 10.215,43.843 10.658,43.4 v1(11.65,43.4)
  Layer 2 w0.2: TP6.1@8.525,14.675 9.3,15.45 9.3,18.125 13.125,21.95 13.125,41.925 v1(11.65,43.4)
  Bottom Layer w0.2: v1(11.65,43.4) 23.9,43.4 32.95,52.45 32.95,74.95 57,99 64.35,99 67.05,101.7 82.225,101.7 83,100.925 X8.12@83,100.096
CAMERA_0_I2C.SCL: DD1.80 TP7.1 X8.13 | length 138.5
  Top Layer w0.2: DD1.80@10.03,47.843 10.643,47.843 10.838,48.038 11.263,48.038 v1(11.275,48.05)
  Layer 2 w0.2: TP7.1@10.483,16.45 14.15,20.117 14.15,42.5 13.25,43.4 13.25,46.45 11.687,48.013 11.312,48.013 v1(11.275,48.05)
  Bottom Layer w0.2: v1(11.275,48.05) 11.288,48.037 14.637,48.037 30.775,64.175 30.775,74.075 56.2,99.5 63.775,99.5 66.875,102.6 82.325,102.6 84,100.925 X8.13@84,100.096
CAMERA_0_I2C.SDA: DD1.82 TP8.1 X8.14 | length 143.3
  Top Layer w0.2: DD1.82@10.03,47.443 10.757,47.443 10.857,47.343 11.245,47.343 v1(11.275,47.313)
  Layer 2 w0.2: TP8.1@10.625,14.675 9.75,15.55 9.75,17.65 13.625,21.525 13.625,42.175 12.75,43.05 12.75,45.838 v1(11.275,47.313)
  Bottom Layer w0.2: v1(11.275,47.313) 10.787,47.313 10.5,47.6 10.5,48.4 10.675,48.575 11.996,48.575 12.096,48.475 14.375,48.475 30.3,64.4 30.3,74.3 55.925,99.925 63.525,99.925 66.625,103.025 82.9,103.025 85,100.925 X8.14@85,100.096
CAMERA_1.RX_CLK0_N: DD1.187 X9.8 | length 70.5
  Top Layer w0.184: DD1.187@40.988,46.243 39.842,46.243 39.746,46.284 38.349,46.284 37.516,45.451 37.516,43.299 38.79,42.026 45.424,42.026 46.399,41.051 46.634,40.816 ccw(c47.132,41.312) 47.629,40.815 47.716,40.902 cw(c47.871,40.747) 48.026,40.592 47.268,39.834 ccw(c47.438,39.662) 47.267,39.833 ccw(c47.764,39.336) 47.267,38.839 ccw(c47.764,39.336) 48.262,38.839 49.021,39.598 cw(c49.175,39.442) 49.33,39.287 48.572,38.53 ccw(c48.743,38.358) 48.572,38.529 ccw(c49.069,38.032) 48.572,37.534 ccw(c49.069,38.032) 49.566,37.534 50.325,38.293 cw(c50.48,38.138) 50.634,37.983 49.877,37.225 ccw(c50.047,37.053) 49.876,37.224 ccw(c50.373,36.727) 49.875,36.231 ; 49.875,36.23 ccw(c50.373,36.727) 50.87,36.23 51.63,36.989 cw(c51.784,36.834) 51.939,36.988 cw(c51.784,36.834) 51.939,36.679 51.181,35.921 ccw(c51.351,35.749) 51.18,35.92 ccw(c51.678,35.423) 51.179,34.927 ccw(c51.678,35.423) 52.175,34.925 52.934,35.685 cw(c53.088,35.529) 53.243,35.684 cw(c53.088,35.529) 53.243,35.374 52.486,34.617 ccw(c52.656,34.444) 52.485,34.616 ccw(c52.982,34.118) 52.484,33.622 ccw(c52.982,34.118) 53.479,33.621 54.238,34.38 cw(c54.393,34.225) 54.548,34.38 cw(c54.393,34.225) 54.548,34.07 54.461,33.983 ccw(c54.958,33.486) 54.462,32.988 55.026,32.424 55.334,32.116 55.459,31.991 78.201,31.991 78.742,32.532 78.742,33.062 79,33.32 X9.8@79,33.5
CAMERA_1.RX_CLK0_P: DD1.189 X9.9 | length 70.5
  Top Layer w0.184: DD1.189@40.988,45.843 39.788,45.843 39.746,45.8 38.55,45.8 38,45.25 38,43.5 38.99,42.51 45.625,42.51 46.741,41.394 46.977,41.157 ccw(c47.132,41.312) 47.287,41.157 47.373,41.243 cw(c47.545,41.073) 47.374,41.244 cw(c47.871,40.747) 48.285,41.315 48.297,41.315 48.367,41.245 cw(c47.871,40.747) 48.369,41.243 48.439,41.173 48.439,41.161 cw(c47.871,40.747) 48.368,40.249 47.609,39.49 ccw(c47.764,39.336) 47.609,39.181 ccw(c47.764,39.336) 47.919,39.181 48.677,39.939 cw(c48.849,39.768) 48.678,39.94 cw(c49.175,39.442) 49.59,40.01 49.602,40.01 49.672,39.94 cw(c49.175,39.442) 49.673,39.939 49.743,39.869 49.743,39.857 cw(c49.175,39.442) 49.672,38.945 48.913,38.186 ccw(c49.069,38.032) 48.914,37.877 ccw(c49.069,38.032) 49.224,37.877 49.981,38.634 cw(c50.153,38.464) 49.982,38.635 cw(c50.48,38.138) 50.894,38.706 50.906,38.706 50.976,38.636 cw(c50.48,38.138) 50.977,38.635 51.048,38.564 51.048,38.552 cw(c50.48,38.138) 50.977,37.641 50.218,36.882 ccw(c50.373,36.727) 50.528,36.572 51.286,37.33 ; X9.9@78,33.5 78,33.32 78.258,33.062 78.258,32.733 78,32.475 67.25,32.475 62.882,32.475 cw(c62.882,32.694) 62.663,32.694 62.663,32.839 ccw(c62.444,32.839) 62.225,32.839 62.225,32.694 cw(c62.006,32.694) 61.787,32.694 61.787,32.839 ccw(c61.567,32.839) 61.348,32.839 61.348,32.694 cw(c61.129,32.694) 60.91,32.694 60.91,32.839 ccw(c60.691,32.839) 60.472,32.839 60.472,32.694 cw(c60.253,32.694) 60.253,32.475 60.161,32.475 55.692,32.475 55.66,32.475 55.369,32.766 54.804,33.331 cw(c54.958,33.486) 54.804,33.641 54.89,33.728 ccw(c54.393,34.225) 54.89,34.722 ccw(c54.393,34.225) 53.895,34.722 ccw(c54.067,34.551) 53.895,34.721 53.137,33.963 cw(c52.982,34.118) 52.827,34.273 53.586,35.032 ccw(c53.088,35.529) 53.586,36.026 ccw(c53.088,35.529) 52.591,36.026 ; 51.287,37.331 cw(c51.784,36.834) 52.281,37.331 cw(c51.784,36.834) 52.281,36.336 51.522,35.577 ccw(c51.678,35.423) 51.832,35.268 52.59,36.026 ; 51.287,37.331 ccw(c51.458,37.16) 51.286,37.33 ; 52.591,36.026 ccw(c52.762,35.855) 52.59,36.026
CAMERA_1.RX_D0_N: DD1.175 X9.2 | length 70
  Top Layer w0.184: 39.783,48.692 37.783,48.692 34.516,45.426 34.516,41.059 37.4,38.175 42.415,38.175 51.624,28.966 81.201,28.966 84.742,32.507 84.742,33.062 85,33.32 X9.2@85,33.5 ; 39.8,48.684 39.842,48.643 DD1.175@40.988,48.643
CAMERA_1.RX_D0_P: DD1.177 X9.3 | length 69.9
  Top Layer w0.184: 39.783,48.208 37.983,48.208 35,45.225 35,41.26 37.601,38.659 42.616,38.659 51.825,29.45 59.4,29.45 60.224,29.45 ccw(c60.224,29.669) 60.443,29.669 60.443,29.79 cw(c60.662,29.79) 60.881,29.79 60.881,29.669 ccw(c61.101,29.669) 61.32,29.669 61.32,29.838 cw(c61.539,29.838) 61.758,29.838 61.758,29.669 ccw(c61.977,29.669) 62.196,29.669 62.196,29.838 cw(c62.415,29.838) 62.634,29.838 62.634,29.669 ccw(c62.853,29.669) 62.853,29.45 63.383,29.45 81,29.45 84.258,32.708 84.258,33.062 84,33.32 X9.3@84,33.5 ; 39.843,48.243 DD1.177@40.988,48.243
CAMERA_1.RX_D1_N: DD1.181 X9.5 | length 71
  Top Layer w0.184: 39.775,47.484 37.909,47.484 36.141,45.716 36.141,41.609 38.175,39.575 44.265,39.575 44.647,39.193 45.535,38.305 cw(c45.38,38.15) 45.535,37.995 45.393,37.852 ccw(c45.563,37.68) 45.392,37.852 ccw(c45.889,37.354) 45.392,36.857 ccw(c45.889,37.354) 46.386,36.857 46.897,37.367 cw(c47.051,37.212) 47.206,37.057 46.697,36.548 ccw(c46.867,36.376) 46.696,36.547 ccw(c47.193,36.05) 46.696,35.553 ccw(c47.193,36.05) 47.691,35.553 48.201,36.063 cw(c48.355,35.908) 48.51,35.753 48.001,35.244 ccw(c48.172,35.072) 48,35.243 ccw(c48.498,34.746) 47.999,34.249 ccw(c48.498,34.746) 48.995,34.248 49.505,34.759 cw(c49.66,34.603) 49.815,34.758 cw(c49.66,34.603) 49.815,34.448 49.306,33.939 ccw(c49.476,33.767) 49.305,33.938 ccw(c49.802,33.441) 49.304,32.945 ccw(c49.802,33.441) 50.299,32.944 50.443,33.087 cw(c50.598,32.933) 50.753,33.087 52.08,31.76 53.474,30.366 79.776,30.366 81.742,32.332 81.742,33.062 82,33.32 X9.5@82,33.5 ; 39.8,47.484 39.842,47.443 DD1.181@40.988,47.443
CAMERA_1.RX_D1_P: DD1.183 X9.6 | length 70.9
  Top Layer w0.184: 39.775,47 39.746,47 ; DD1.183@40.988,47.043 39.788,47.043 39.746,47 ; X9.6@81,33.5 81,33.32 81.258,33.062 81.258,32.533 79.575,30.85 67.35,30.85 62.863,30.85 cw(c62.863,31.069) 62.644,31.069 62.644,31.199 ccw(c62.425,31.199) 62.206,31.199 62.206,31.069 cw(c61.987,31.069) 61.768,31.069 61.768,31.199 ccw(c61.549,31.199) 61.33,31.199 61.33,31.069 cw(c61.111,31.069) 60.892,31.069 60.892,31.199 ccw(c60.673,31.199) 60.453,31.199 60.453,31.069 cw(c60.234,31.069) 60.234,30.85 60.142,30.85 53.675,30.85 52.423,32.102 51.095,33.43 ccw(c50.598,32.933) 50.101,33.43 49.957,33.286 cw(c49.802,33.441) 49.647,33.596 50.157,34.106 ccw(c49.66,34.603) 50.157,35.101 ccw(c49.66,34.603) 49.163,35.101 ccw(c49.334,34.929) 49.162,35.1 48.653,34.591 cw(c48.498,34.746) 48.342,34.9 48.853,35.41 ccw(c48.355,35.908) 48.924,36.322 48.924,36.334 48.853,36.404 ccw(c48.355,35.908) 48.852,36.406 48.782,36.476 48.77,36.476 ccw(c48.355,35.908) 47.858,36.405 ccw(c48.029,36.234) 47.857,36.404 47.348,35.895 cw(c47.193,36.05) 47.038,35.895 cw(c47.193,36.05) 47.038,36.204 47.548,36.715 ccw(c47.051,37.212) 47.619,37.626 47.619,37.638 47.549,37.709 ccw(c47.051,37.212) 47.548,37.71 47.477,37.78 47.465,37.78 ccw(c47.051,37.212) 46.554,37.709 ccw(c46.725,37.538) 46.553,37.708 46.044,37.199 cw(c45.889,37.354) 45.734,37.199 cw(c45.889,37.354) 45.734,37.509 45.878,37.653 ccw(c45.38,38.15) 45.878,38.647 44.989,39.536 44.466,40.059 38.376,40.059 36.625,41.81 36.625,45.516 38.109,47 39.746,47
CAMERA_1_I2C.SCL: DD1.36 R8.2 TP9.1 X9.13 | length 144
  Top Layer w0.2: DD1.36@10.03,56.643 10.045,56.628 10.472,56.628 11.122,55.978 11.647,55.978 v1@11.8,55.978 ; v1(11.8,56) 12.6,56 12.75,55.85 R8.2@12.75,55.825
  Layer 2 w0.2: v1(11.8,56) 10.425,54.625 10.425,49.975 13.7,46.7 13.7,43.675 14.65,42.725 14.65,18.658 TP9.1@12.442,16.45
  Bottom Layer w0.2: v1(11.8,56) 8.325,52.525 8.325,41.675 10.725,39.275 21.325,39.275 36.375,54.325 43,54.325 56,41.325 67.55,41.325 74,34.875 X9.13@74,33.5
CAMERA_1_I2C.SDA: DD1.37 R7.2 TP10.1 X9.14 | length 155.1
  Top Layer w0.2: v1(5.976,55.999) 6.084,55.999 6.314,56.228 6.936,56.228 DD1.37@6.95,56.243 ; v1(11.775,56.725) 11.883,56.725 12.183,57.025 R7.2@12.75,57.025
  Layer 2 w0.2: v1(5.976,55.999) 6.014,55.961 6.014,43.214 3.5,40.7 3.5,17.167 6.967,13.7 11.25,13.7 TP10.1@12.225,14.675
  Bottom Layer w0.2: v1(5.976,55.999) 7.85,55.999 ; v1(11.775,56.725) 9,56.725 8.274,55.999 7.85,55.999 ; X9.14@73,33.5 73,35.15 67.325,40.825 55.8,40.825 42.775,53.85 36.6,53.85 21.55,38.8 10.525,38.8 7.85,41.475 7.85,55.999
"CHARGE LEVEL": R14.1 TP22.1 X13.5 | length 142.2
  Top Layer w0.2: v1(24.1,116.725) 24.55,116.725 25.475,117.65 R14.1@26.05,117.65
  Layer 2 w0.2: TP22.1@9.65,103.1 9.65,101 11.2,99.45 14.925,99.45 19.25,95.125 19.25,84.225 21.1,82.375 21.1,69.075 35.875,54.3 43.825,54.3 50.225,47.9 83.165,47.9 X13.5@85.04,49.775
  Bottom Layer w0.2: TP22.1@9.65,102.837 11.388,104.575 18.775,104.575 20.2,106 20.2,114.875 22.05,116.725 v1(24.1,116.725)
CHG_LEVEL_4: DD3.14 R14.2 | length 1.3
  Top Layer w0.2: R14.2@26.05,118.652 26.05,119.086 26.45,119.486 DD3.14@26.45,119.8
CM5_1,8В: DD1.88 DD1.90 TP21.1 С35.2 С36.2 | length 35.9
  Top Layer w0.25: DD1.90@10.03,45.843 10.903,45.843 11.06,46 10.818,46.243 DD1.88@10.03,46.243 ; 11.035,45.975 С35.2@12.275,45.975 С36.2@13.42,45.975 ; С36.2@13.407,45.988 13.42,46 14.5,46 v1(14.525,46.025)
  Layer 2 w0.2: TP21.1@14.4,16.45 15.175,17.225 15.175,45.375 v1(14.525,46.025)
CM5_3,3В: DD1.84 DD1.86 DD7.5 R3.2 R4.2 R7.1 R8.1 R33.2 R34.2 R38.2 R40.2 R43.2 SW1.1 TP20.1 VD7.2 VD8.2 X8.15 X9.15 С31.2 С33.2 | length 370.6
  Top Layer w0.2: v1(1.625,41.075) 1.625,42.275 1.925,42.575 1.925,42.625 2.075,42.775 R33.2@2.125,42.775 R34.2@3.283,42.775 ; VD7.2@3.8,113.925 3.75,113.875 v1(1.675,113.875) 1.675,112.25 2.9,111.025 VD8.2@3.8,111.025 3.8,109.375 4,109.175 DD7.5@4,107.7 ; DD1.86@10.03,46.643 11.132,46.643 10.732,47.043 DD1.84@10.03,47.043
  Top Layer w0.3: 11.132,46.643 11.993,46.643 С33.2@12.275,46.925 С31.2@13.43,46.925 13.443,46.913 v1(14.512,46.913) ; R4.2@13.75,58.225 R7.1@13.75,57.025 R8.1@13.75,55.825 13.75,54.7 14.25,54.2 R3.2@14.25,53.05 15.25,53.05 17.025,51.275 17.025,47.8 ; TP20.1@14.4,14.675 16.775,14.675 27.075,4.375 SW1.1@52,4.375 ; R38.2@14.5,48 14.506,47.994 14.506,46.919 v1(14.512,46.913) ; v1(18.95,47) 18.15,47.8 17.025,47.8 ; v1(14.512,46.913) 15.4,47.8 17.025,47.8
  Layer 2 w0.2: TP20.1@14.416,14.675 15.725,15.984 15.725,26.725 17.725,28.725 17.725,43.7 v1(14.512,46.913)
  Layer 3 w0.3: v1(1.675,113.875) 0.775,112.975 0.775,41.525 1.195,41.105 1.595,41.105 v1(1.625,41.075) 2.9,41.075 7.475,45.65 13.25,45.65 v1(14.512,46.913)
  Layer 3 w0.8: v1(18.95,47) 65.917,47 ; X9.15@72,33.514 72,34.475 73.3,35.775 88.675,35.775 89.85,36.95 89.85,42.925 85.775,47 65.917,47 ; X8.15@86,100.096 86,96.25 84.1,94.35 75.825,94.35 69.15,87.675 69.15,50.233 65.917,47
  Bottom Layer w0.2: X9.15@72,33.5 72,32.475 72.525,31.95 R40.2@73.475,31.95
DEBUG_SW1: R18.1 SW12.2 VD12.1 | length 9.5
  Top Layer w0.2: R18.1@34.4,128.35 36.26,128.35 SW12.2@36.275,128.335 SW12.2@42.075,128.335 VD12.1@43.875,128.335
DEBUG_SW1_4: DD3.38 R18.2 | length 7.3
  Top Layer w0.2: DD3.38@30.95,126.55 30.95,129.35 31.8,130.2 34.125,130.2 34.4,129.925 R18.2@34.4,129.35
DEBUG_SW2: R17.1 SW13.2 VD11.1 | length 21.6
  Top Layer w0.2: R17.1@34.65,124.7 38.487,124.7 40.638,126.85 45.69,126.85 SW13.2@47.175,128.335 SW13.2@52.975,128.335 VD11.1@54.775,128.335
DEBUG_SW2_4: DD3.33 R17.2 | length 1.8
  Top Layer w0.2: DD3.33@32.075,124.425 32.825,124.425 33.1,124.7 R17.2@33.75,124.7
DEBUG_SW3: R19.3 SW14.2 VD10.1 | length 21
  Top Layer w0.2: VD10.1@16.325,129.825 16.325,129.2 16.65,128.875 21.2,128.875 21.575,129.25 SW14.2@21.575,130.525 21.575,132 22.1,132.525 29.25,132.525 29.775,132 29.775,131.6 29.45,131.275 R19.3@29.45,128.702
DEBUG_SW3_4: DD3.41 R19.4 | length 1.2
  Top Layer w0.2: DD3.41@29.45,126.55 R19.4@29.45,127.7
DEBUG_SW4: R14.3 SW15.2 VD9.1 | length 27.8
  Top Layer w0.2: SW15.2@11.625,107.77 11.625,105.15 12.05,104.725 17.5,104.725 20.3,107.525 20.3,115.375 21.125,116.2 24.6,116.2 25.45,117.05 26.127,117.05 26.525,117.448 26.525,117.625 R14.3@26.55,117.65
DEBUG_SW4_4: DD3.15 R14.4 | length 1.3
  Top Layer w0.2: R14.4@26.55,118.652 26.55,118.985 26.95,119.385 DD3.15@26.95,119.8
ENC1_A: R21.5 X10.5 | length 63.2
  Top Layer w0.2: R21.5@29.45,117.648 29.45,117 v1(29.825,116.625)
  Layer 2 w0.2: v1(29.825,116.625) 29.825,98.675 36.9,91.6 44.3,91.6 51.025,84.875 51.025,69.77 X10.5@49.553,68.298
ENC1_A_4: DD3.20 R21.6 | length 1.2
  Top Layer w0.2: R21.6@29.45,118.65 DD3.20@29.45,119.8
ENC1_B: R21.7 X10.7 | length 65.4
  Top Layer w0.2: R21.7@29.95,117.648 29.95,117.475 v1(30.8,116.625)
  Layer 2 w0.2: v1(30.8,116.625) 30.8,98.6 37.1,92.3 44.5,92.3 51.45,85.35 51.45,68.195 X10.7@49.553,66.298
ENC1_B_4: DD3.21 R21.8 | length 1.2
  Top Layer w0.2: R21.8@29.95,118.65 DD3.21@29.95,119.8
ENC2_A: R20.1 X10.13 | length 72.5
  Top Layer w0.2: R20.1@34.152,120.025 34.176,120.001 34.176,118.024 v1(34.2,118)
  Layer 2 w0.2: v1(34.2,118) 34.15,117.95 34.15,96.25 37.4,93 44.9,93 51.875,86.025 51.875,62.62 X10.13@49.553,60.298
ENC2_A_4: DD3.25 R20.2 | length 1.2
  Top Layer w0.2: DD3.25@32.075,120.425 32.35,120.425 32.75,120.025 R20.2@33.15,120.025
ENC2_B: R20.3 X10.15 | length 75.6
  Top Layer w0.2: R20.3@34.152,120.525 34.65,120.525 35.125,120.05 v1(35.125,117.95)
  Layer 2 w0.2: v1(35.125,117.95) 35.125,96.25 37.775,93.6 45.4,93.6 52.3,86.7 52.3,61.045 X10.15@49.553,58.298
ENC2_B_4: DD3.26 R20.4 | length 1.2
  Top Layer w0.2: DD3.26@32.075,120.925 32.472,120.925 32.872,120.525 R20.4@33.15,120.525